# Altium PCB LDR_PCB.PcbDoc
Units mil, origin at the board's own origin, x right, y up, seen from the top; angles counter-clockwise.
Board outline 1563.77 x 526.02 mil, 2 copper layers (Top Layer, Bottom Layer); 5 components, 4 nets, 11 pads, 0 vias.
Unrouted connection lines stored in the file: 6.
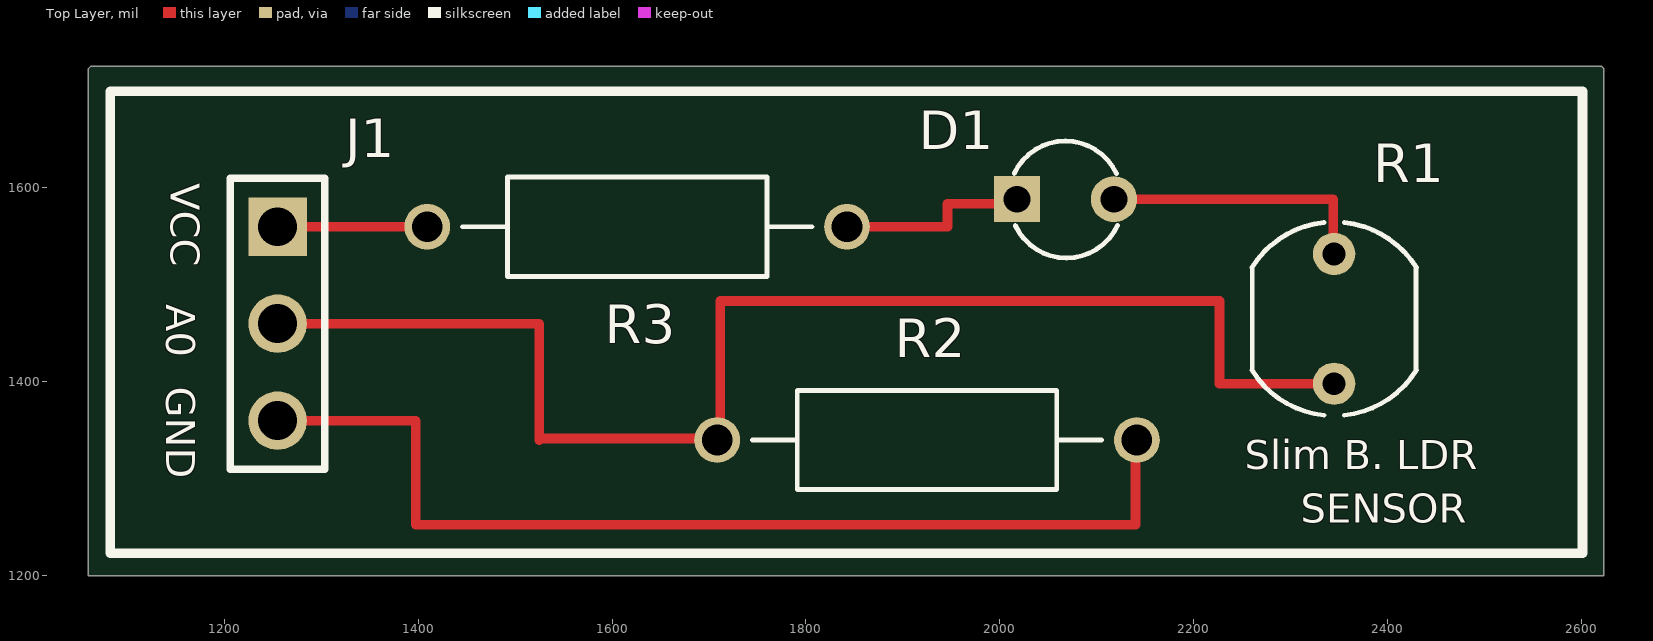
[diagram p0: Top Layer view]
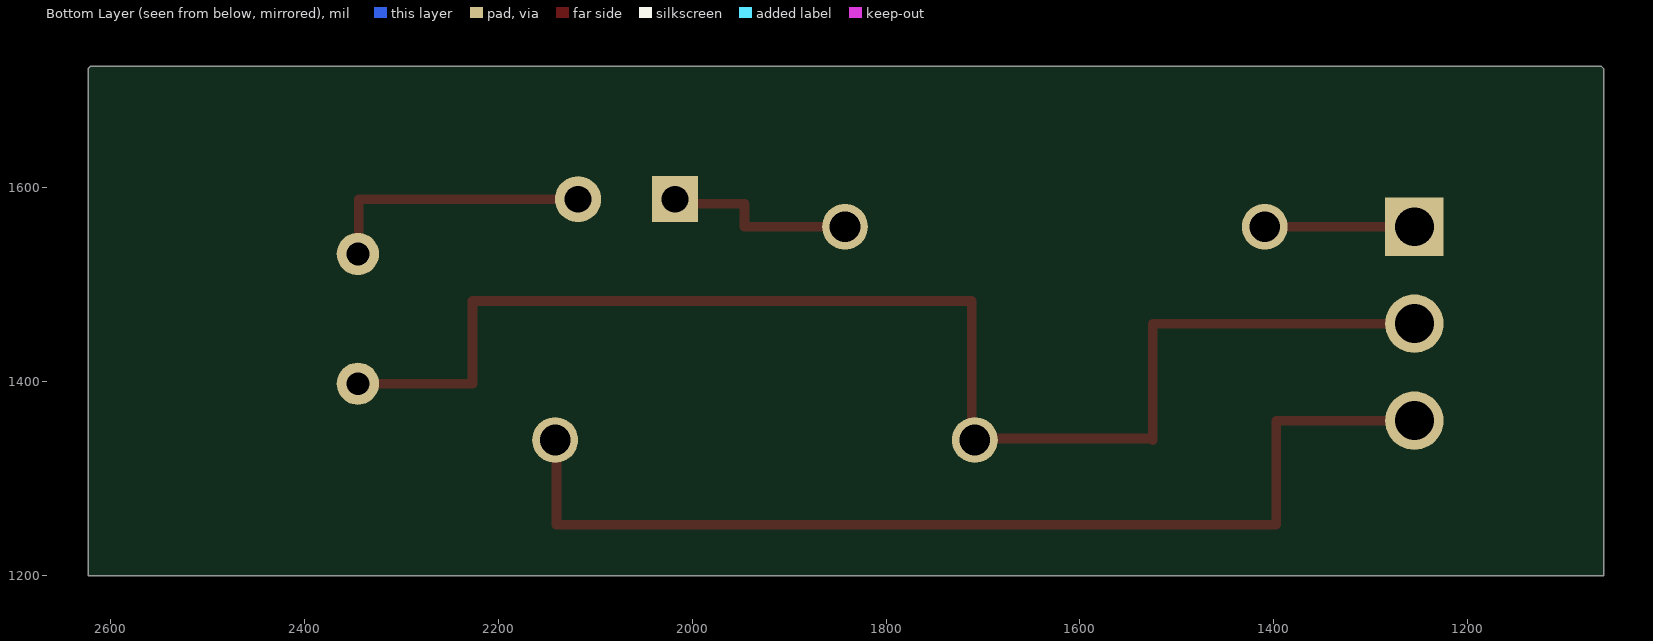
[diagram p1: Bottom Layer view, seen from below]

## Layer stack, top to bottom
Top Solder: solder mask 0.4, Solder Resist, Dk 3.5
Top Layer: signal copper 1.4
Dielectric 1: dielectric 12.6, FR-4, Dk 4.8
Bottom Layer: signal copper 1.4
Bottom Solder: solder mask 0.4, Solder Resist, Dk 3.5

## Board outline
2620.63,1725.73 2623.29,1723.07 2623.29,1199.71 1059.52,1199.71 1059.52,1722.7 1062.55,1725.73

## Design rules (kind name [scope] priority, off if disabled: settings)
Clearance [All] p1: gap=10 ignorepadtopadclearanceinfootprint=FALSE
PolygonConnect [All] p1: connectstyle=Relief reliefconductorwidth=10 reliefentries=4 polygonreliefangle="90 Angle" airgapwidth=10
RoutingVias [All] p1: holewidth=28 width=50 viastyle="Through Hole" minholewidth=28 minwidth=50 maxholewidth=28 maxwidth=50
SolderMaskExpansion [All] p1: expansion=4 istentingtop=FALSE
SupplyNets "Schematic Supply Nets_1" [InNet('VCC')] p1: voltage=0.000
SupplyNets "Schematic Supply Nets" [InNet('GND')] p2: voltage=0.000
Width [All] p1: maxlimit=10 minlimit=10 preferedwidth=10
30 further rules are at their usual default settings.

## Components (designator, comment, footprint, x,y, rotation, side; value= is the part's Value field where it differs from the comment)
D1 "OVLAW4CB7" LEDRD254W50D305H520P 2067.87,1588.51 r0 top
J1 "MTSW-103-07-G-S-140" PBC03SAAN 1255,1460 r90 top
R1 "LDR" PDV-P8104 2345,1465 r90 top value=-60000R
R2 "1K" CF14JT1K00 1925,1340 r180 top
R3 "1K" CF14JT1K00 1625.91,1560 r180 top

## Footprints (in the part's own frame and the unit in brackets; to place one, negate y for a bottom-side part, rotate by r counter-clockwise, add the part's x,y. Pads: shape width x height; smd on the part's side, far side on the other; paste and mask are expansions set on the pad)
CF14JT1K00 [mm]
  round 1.2 hole 0.8: 1(-5.5,0) 2(5.5,0)
  silkscreen extent -4.58,-1.3 4.58,1.3, body extent -5.77,-1.2 5.77,1.2, height 2.4
LEDRD254W50D305H520P [mm]
  rect 1.208x1.208 / inner round 1.208 / far side rect 1.208x1.208 hole 0.7: A(-1.27,0)
  round 1.208 hole 0.7: C(1.27,0)
  silkscreen extent -1.34,-1.54 1.36,1.52, body extent -1.59,-1.9 1.91,1.9, height 6.71
PBC03SAAN [mm]
  rect 1.53x1.53 / inner round 1.53 / far side rect 1.53x1.53 hole 1.02: 01(2.54,0)
  round 1.53 hole 1.02: 02(0,0) 03(-2.54,0)
  silkscreen extent -3.81,-1.24 3.81,1.24
PDV-P8104 [mm]
  round 1.108 hole 0.6: 1(-1.7,0) 2(1.7,0)
  silkscreen extent -2.53,-2.15 2.53,2.15, body extent -2.54,-2.14 2.54,2.14, height 2.38

## Part data
D1: "Ovlaw4Cb7 White LED 3mm (T-1) Round Lens Through Hole Package", Package=Package, Check_prices=https://www.snapeda.com/parts/OVLAW4CB7/TT+Electronics%252FOptek/view-part/?ref=eda, MF="TT Electronics/Optek", MP=OVLAW4CB7, SnapEDA_Link=https://www.snapeda.com/parts/OVLAW4CB7/TT+Electronics%252FOptek/view-part/?ref=snap
J1: Package=None, Availability=Unavailable, MP=MTSW-103-07-G-S-140, Price=None
R1: library part PDV-P8104, "CDS PHOTORESISTOR 5MM", Case/Package=Radial, Manufacturer="Advanced Photonix", Max Operating Temperature=75°C, Min Operating Temperature=-30°C, Supplier Part Number=PDV-P8104-ND, Category="Optical Sensors", ComponentLink1Description=https://datasheet.ciiva.com/2819/pdv-p8104-2819548.pdf?src-supplier=Digikey, ComponentLink1URL=https://datasheet.ciiva.com/2819/pdv-p8104-2819548.pdf?src-supplier=Digikey, Diameter=5.1mm, Height=2mm, Housing Material=Ceramic, Lead Free="Lead Free", Manufacturer Part Number=PDV-P8104, Packaging=Bag, Pricing="1=0.87, 5=0.762, 10=0.724, 25=0.6772, 50=0.6454, 100=0.6164, 500=0.55816, 1000=0.53652, 5000=0.49297 (USD)", Rise Time=60ms, RoHS=No, Series=-, Stock=5792, Supplier=Digikey, Wavelength=520nm
R2 R3: library part CF14JT1K00, "RES 1K OHM 5% 1/4W AXIAL", Manufacturer="Stackpole Electronics", Supplier Part Number=CF14JT1K00CT-ND, Category="Through-Hole Resistors", ComponentLink1Description=http://components.arrow.com/part/dataview/27620077S9848643N1174?src-supplier=Arrow+Electronics, ComponentLink1URL=http://components.arrow.com/part/dataview/27620077S9848643N1174?src-supplier=Arrow+Electronics, ComponentLink2Description=https://www.seielect.com/catalog/SEI-CF_CFM.pdf?src-supplier=Avnet, ComponentLink2URL=https://www.seielect.com/catalog/SEI-CF_CFM.pdf?src-supplier=Avnet, ComponentLink3Description=https://www.seielect.com/catalog/SEI-Packaging.pdf?src-supplier=Digikey, ComponentLink3URL=https://www.seielect.com/catalog/SEI-Packaging.pdf?src-supplier=Digikey, ComponentLink4Description=https://www.seielect.com/Catalog/SEI-CF_CFM.pdf?src-supplier=Digikey, ComponentLink4URL=https://www.seielect.com/Catalog/SEI-CF_CFM.pdf?src-supplier=Digikey, ComponentLink5Description=http://www.seielect.com/Catalog/SEI-CF_CFM.pdf?src-supplier=Future+Electronics, ComponentLink5URL=http://www.seielect.com/Catalog/SEI-CF_CFM.pdf?src-supplier=Future+Electronics, ComponentLink6Description=https://www.verical.com/server-webapp/html/getDatasheet?partID=360403&src-supplier=Verical, ComponentLink6URL=https://www.verical.com/server-webapp/html/getDatasheet?partID=360403&src-supplier=Verical, ComponentLink7Description=https://datasheet.octopart.com/CF14JT1K00-Stackpole-Electronics-datasheet-8360004.pdf?src-supplier=Future+Electronics, ComponentLink7URL=https://datasheet.octopart.com/CF14JT1K00-Stackpole-Electronics-datasheet-8360004.pdf?src-supplier=Future+Electronics, ComponentLink8Description=https://datasheet.octopart.com/CF14JT1K00-Stackpole-Electronics-datasheet-32780772.pdf?src-supplier=Master+Electronics, ComponentLink8URL=https://datasheet.octopart.com/CF14JT1K00-Stackpole-Electronics-datasheet-32780772.pdf?src-supplier=Master+Electronics, Manufacturer Part Number=CF14JT1K00, Pricing="1=0.1, 10=0.026, 25=0.022, 50=0.0192, 100=0.0169, 250=0.01424, 500=0.0126, 1000=0.0112 (USD)", RoHS=Yes, Stock=677085, Supplier=Digikey

## Nets (pads, with @x,y where several pads share a name; then routed paths per layer and width w, separated by ;. In a path a pad name is that pad's centre, name@x,y a point inside that pad or via, vN(x,y) a via of type N, cw(c..) or ccw(c..) an arc to the next point about the centre after c; other vN are vias at no path point)
A0: J1.02 R1.2 R2.2 | length 2.2
  Top Layer w10: R2.2 R2.2@1710,1341.54
GND: J1.03 R2.1 | length 2.2
  Top Layer w10: R2.1@2140,1338.46 R2.1
NetD1_C: D1.C R3.2
VCC: D1.A R1.1 R3.1
pads on no net: J1.01
copper on no net: | length 3136.4
  Top Layer w10: 1255,1360 1397.48,1360 1397.48,1252.57 2140,1252.57 2140,1338.46 ; 1255,1460 1524.81,1460 1524.81,1340 1526.35,1341.54 1706.93,1341.54 ; 1255,1560 1408.79,1560 ; 1711.75,1346.36 1711.75,1483.46 2226.7,1483.46 2226.7,1398.07 2345,1398.07 ; 1842.45,1560 1946.16,1560 1946.16,1583.62 2012.98,1583.62 ; 2117.87,1588.51 2344.05,1588.51 2344.05,1532.87

## Silkscreen, mask and mechanical layers (free items; w line width, h text height)
Top Overlay:
  lines w10: 1082.35,1223.18 2601.3,1223.18 2601.3,1699.71 1082.35,1699.71 1082.35,1223.18
  text "VCC" at 1145,1605 h30 r270
  text "A0" at 1140,1480 h30 r270
  text "GND" at 1140,1395 h30 r270
  text "Slim B. LDR" at 2252.91,1309.83 h30
  text "SENSOR" at 2310.67,1254.7 h30